# EAGLE board power (EAGLE 5.11)
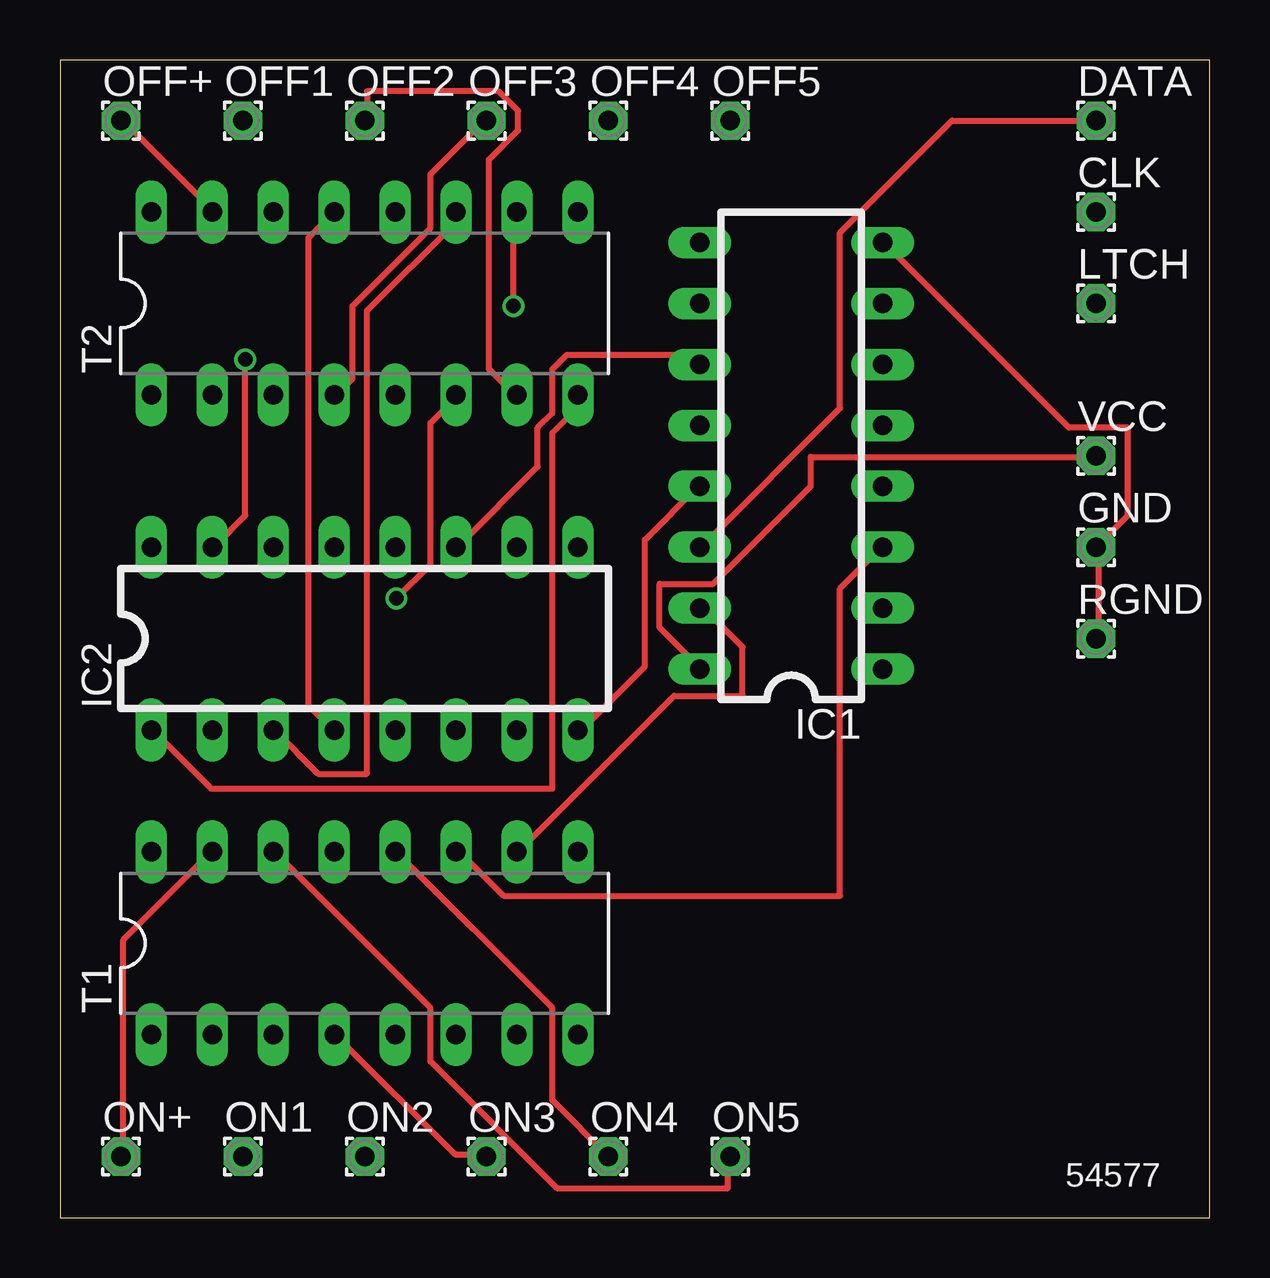
[diagram p0: board, top side]
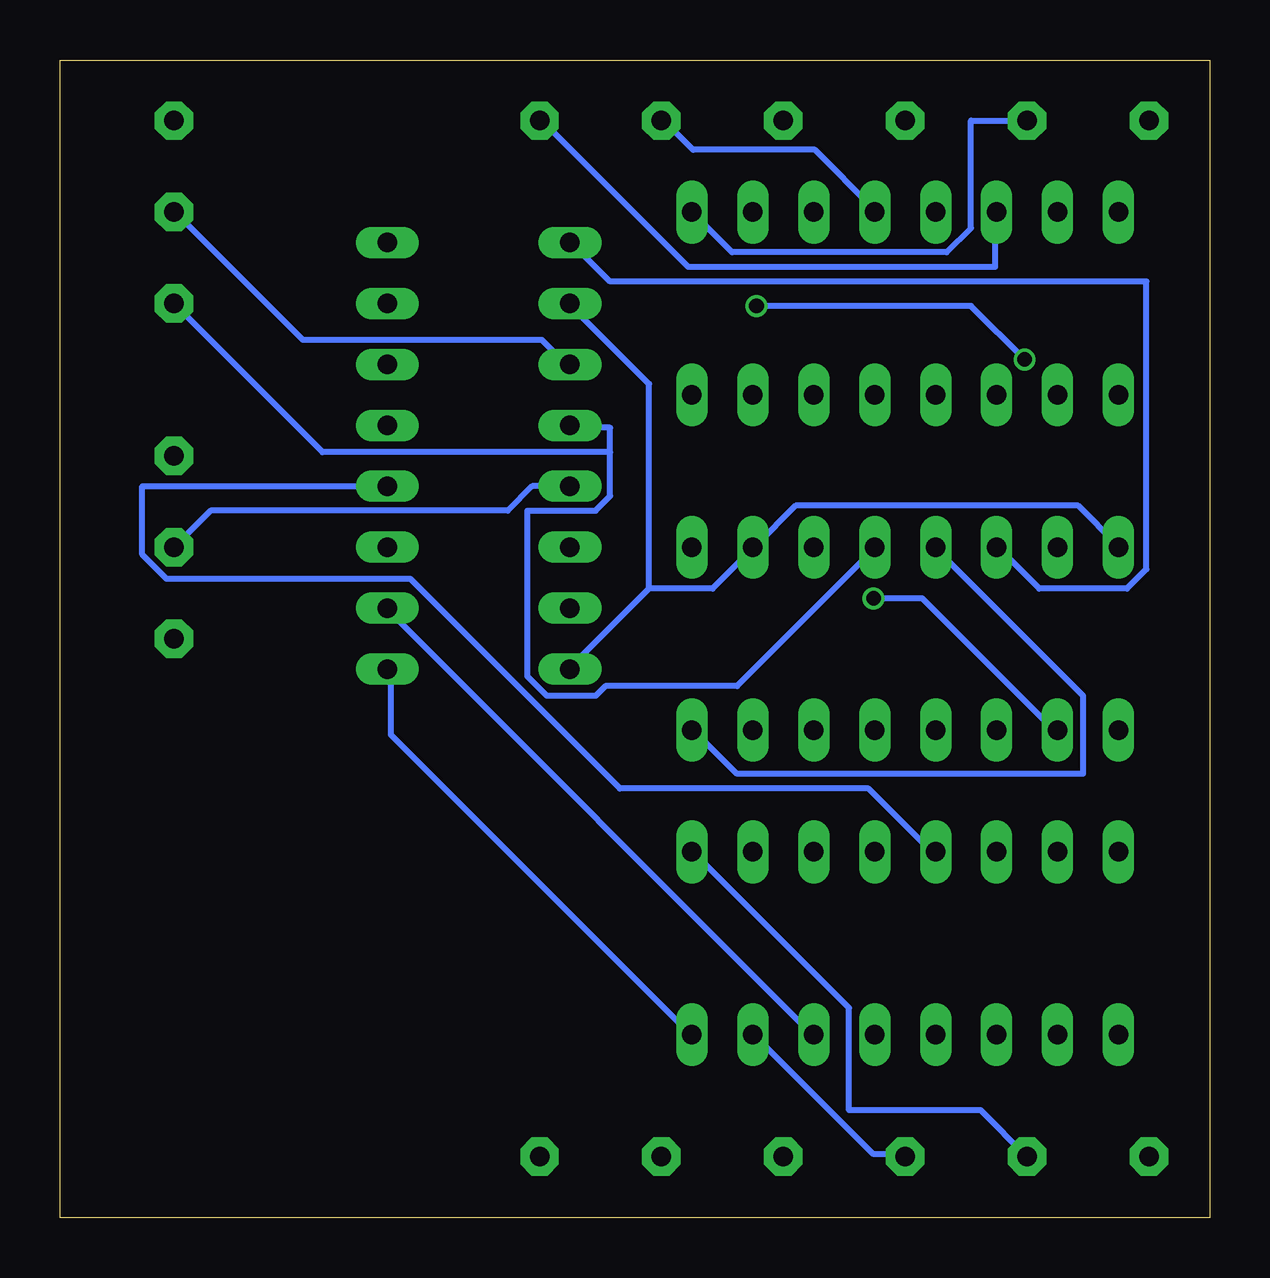
[diagram p1: board, bottom side, seen from below]

Size 47.93 x 48.25 mm. Coordinates in mm from the lower left corner, seen from the top.
Outline: 0,0 47.93,0 47.93,48.25 0,48.25 0,0
Copper layers (1*16): Top 0.035mm / dielectric 1.5mm / Bottom 0.035mm
Design rules "Fusion_eagle_rule_v1.1": minimum track width 6mil, minimum drill 12mil, track to track 6mil, track to pad 6mil, pad to pad 6mil, via to via 6mil, smd to smd 0mil, copper to edge 10mil, drill to drill 10mil, minimum pad ring 10mil, minimum via ring 6mil, stop-mask expansion 2mil, vias tented up to drill 100mil, thermal gap 10mil

## Footprints (pad centres in the part's own frame; a part is rotated, then mirrored left to right if it is on the bottom)
1,6/0,8 = drill 0.813 pad 1.6 octagon: 1 0,0
DIL16 = drill 0.813 long: 1 -8.89,-3.81; 2 -6.35,-3.81; 3 -3.81,-3.81; 4 -1.27,-3.81; 5 1.27,-3.81; 6 3.81,-3.81; 7 6.35,-3.81; 8 8.89,-3.81; 9 8.89,3.81; 10 6.35,3.81; 11 3.81,3.81; 12 1.27,3.81; 13 -1.27,3.81; 14 -3.81,3.81; 15 -6.35,3.81; 16 -8.89,3.81

## Placement (x,y rotation side)
CLK  [1,6/0,8]  43.18,41.91 0 top
DATA  [1,6/0,8]  43.18,45.72 0 top
GND  [1,6/0,8]  43.18,27.94 0 top
IC1  74LS595N  [DIL16]  30.48,31.75 90 top
IC2  74LS595N  [DIL16]  12.7,24.13 0 top
LTCH  [1,6/0,8]  43.18,38.1 0 top
OFF1  [1,6/0,8]  7.62,45.72 0 top
OFF2  [1,6/0,8]  12.7,45.72 0 top
OFF3  [1,6/0,8]  17.78,45.72 0 top
OFF4  [1,6/0,8]  22.86,45.72 0 top
OFF5  [1,6/0,8]  27.94,45.72 0 top
OFF+  [1,6/0,8]  2.54,45.72 0 top
ON1  [1,6/0,8]  7.62,2.54 0 top
ON2  [1,6/0,8]  12.7,2.54 0 top
ON3  [1,6/0,8]  17.78,2.54 0 top
ON4  [1,6/0,8]  22.86,2.54 0 top
ON5  [1,6/0,8]  27.94,2.54 0 top
ON+  [1,6/0,8]  2.54,2.54 0 top
RGND  [1,6/0,8]  43.18,24.13 0 top
T1  [DIL16]  12.7,11.43 0 top
T2  [DIL16]  12.7,38.1 0 top
VCC  [1,6/0,8]  43.18,31.75 0 top

## Library data of the parts
CLK DATA GND LTCH OFF1-OFF5 OFF+ ON1-ON5 ON+ RGND VCC = wirepad
IC1 IC2 = SparkFun
T1 T2 = transistor

## Nets
CLK: CLK.1 IC1.11 IC2.11
CRY: IC1.9 IC2.14
DATA: DATA.1 IC1.14
GND: GND.1 IC1.8 IC1.13 IC2.8 IC2.13 RGND.1
LTCH: IC1.12 IC2.12 LTCH.1
N$1: ON1.1 T1.9
N$2: ON2.1 T1.7
N$3: ON3.1 T1.4
N$4: ON4.1 T1.12
N$5: ON5.1 T1.14
N$7: IC2.4 T2.13
N$8: IC2.3 T2.11
N$9: IC2.2 T2.6
N$10: IC2.1 T2.8
N$11: IC1.4 T1.13
N$12: IC1.3 T1.11
N$13: IC1.2 T1.6
N$14: IC1.1 T1.8
N$15: IC1.15 T1.10
N$16: IC2.15 T2.10
N$20: OFF1.1 T2.9
N$21: OFF2.1 T2.7
N$22: OFF3.1 T2.4
N$23: OFF4.1 T2.12
N$24: OFF5.1 T2.14
OFF+: OFF+.1 T2.15
ON+: ON+.1 T1.15
VCC: IC1.10 IC1.16 IC2.10 IC2.16 VCC.1

## Tracks (layer width: path | path; a pad name or v marks a point on that pad's centre or on a via)
CLK
  Top 0.254: IC2.11 16.66,28.04 19.91,31.29 19.91,32.92 20.52,33.53 20.52,35.36 21.13,35.97 26.62,35.97 26.62,35.56 IC1.11
  Bottom 0.254: CLK.1 43.08,41.86 37.8,36.58 27.84,36.58 26.82,35.56 IC1.11
CRY
  Bottom 0.254: IC2.14 8.74,27.84 7.11,26.21 3.45,26.21 2.64,27.03 2.64,39.01 24.99,39.01 26.62,40.64 IC1.9
DATA
  Top 0.254: IC1.14 26.82,28.04 32.51,33.73 32.51,41.05 37.19,45.72 DATA.1
GND
  Top 0.254: IC1.8 34.34,40.64 42.06,32.92 44.5,32.92 44.5,29.26 GND.1 43.28,27.84 43.28,24.18 RGND.1 | IC2.8 21.74,20.32 24.38,22.96 24.38,28.25 26.62,30.48 IC1.13
  Bottom 0.254: IC2.13 11.38,27.84 5.28,21.74 5.28,18.49 19.71,18.49 21.54,20.32 IC2.8 | GND.1 41.66,29.46 29.26,29.46 28.25,30.48 IC1.13
LTCH
  Bottom 0.254: 24.99,31.9 24.99,32.92 26.62,32.92 IC1.12 | 24.99,31.9 24.99,30.07 25.6,29.46 28.45,29.46 28.45,22.55 27.64,21.74 25.6,21.74 25.2,22.15 19.71,22.15 14.02,27.84 IC2.12 | 24.99,31.9 36.98,31.9 LTCH.1
N$1
  Bottom 0.254: T1.9 21.54,15.24 15.04,8.74 15.04,4.47 9.55,4.47 ON1.1
N$2
  Bottom 0.254: T1.7 18.9,7.52 14.02,2.64 12.8,2.64 ON2.1
N$3
  Top 0.254: T1.4 11.58,7.52 16.46,2.64 17.68,2.64 ON3.1
N$4
  Top 0.254: T1.12 14.02,15.24 20.52,8.74 20.52,4.88 ON4.1
N$5
  Top 0.254: T1.14 8.94,15.24 15.44,8.74 15.44,6.5 20.73,1.22 27.84,1.22 27.84,2.44 ON5.1
N$7
  Top 0.254: IC2.4 11.38,20.32 10.36,21.34 10.36,40.84 T2.13
N$8
  Top 0.254: IC2.3 8.94,20.32 10.77,18.49 12.8,18.49 12.8,37.8 16.46,41.45 16.46,41.86 T2.11
N$9  (via drill 0.61)
  Top 0.254: v14.02,25.81 15.44,27.23 15.44,33.12 16.46,34.14 T2.6
  Bottom 0.254: v14.02,25.81 11.99,25.81 6.5,20.32 IC2.2
N$10
  Top 0.254: IC2.1 3.86,20.32 6.3,17.88 20.52,17.88 20.52,32.72 21.54,33.73 21.54,34.14 T2.8
N$11
  Bottom 0.254: T1.13 11.58,15.24 14.22,17.88 24.59,17.88 33.33,26.62 43.48,26.62 44.5,27.64 44.5,30.48 IC1.4
N$12
  Top 0.254: T1.11 16.66,15.24 18.49,13.41 32.51,13.41 32.51,26.21 34.14,27.84 IC1.3
N$13
  Bottom 0.254: T1.6 16.66,7.72 34.34,25.4 IC1.2
N$14
  Bottom 0.254: T1.8 21.74,7.72 34.14,20.12 34.14,22.76 IC1.1
N$15
  Top 0.254: T1.10 19.1,15.24 25.6,21.74 28.45,21.74 28.45,23.77 26.82,25.4 IC1.15
N$16  (via drill 0.61)
  Top 0.254: v7.72,35.76 7.72,29.26 6.5,28.04 IC2.15 | v18.9,38 18.9,41.86 T2.10
  Bottom 0.254: v7.72,35.76 9.96,38 v18.9,38
N$20
  Bottom 0.254: T2.9 19.91,40.23 10.97,40.23 9.96,41.25 9.96,45.72 OFF1.1
N$21
  Top 0.254: T2.7 18.9,34.34 17.88,35.36 17.88,44.09 19.1,45.31 19.1,46.13 18.29,46.94 12.8,46.94 12.8,45.72 OFF2.1
N$22
  Top 0.254: T2.4 11.58,34.34 12.19,34.95 12.19,38 15.44,41.25 15.44,43.48 17.68,45.72 OFF3.1
N$23
  Bottom 0.254: T2.12 14.02,42.06 16.46,44.5 21.54,44.5 22.76,45.72 OFF4.1
N$24
  Bottom 0.254: T2.14 8.94,41.86 8.94,39.62 21.74,39.62 27.84,45.72 OFF5.1
OFF+
  Top 0.254: T2.15 6.3,42.06 2.64,45.72 OFF+.1
ON+
  Top 0.254: T1.15 6.3,15.24 2.64,11.58 2.64,2.64 ON+.1
VCC
  Top 0.254: VCC.1 43.08,31.7 31.29,31.7 31.29,30.48 27.23,26.42 24.99,26.42 24.99,24.59 26.62,22.96 IC1.16
  Bottom 0.254: IC2.16 3.86,28.04 5.49,29.67 17.27,29.67 18.9,28.04 IC2.10 19.1,27.84 20.73,26.21 23.37,26.21 | 23.37,26.21 26.62,22.96 IC1.16 | 23.37,26.21 23.37,34.75 26.62,38 IC1.10

## Text on the board
tNames: 54577